# Altium PCB Raspberry_EXT_v1.PcbDoc
Units mm, origin at the board's own origin, x right, y up, seen from the top; angles counter-clockwise.
Board outline 121.65 x 56 mm, 2 copper layers (Top Layer, Bottom Layer); 6 components, 2 nets, 71 pads, 4 vias.
Unrouted connection lines stored in the file: 2.
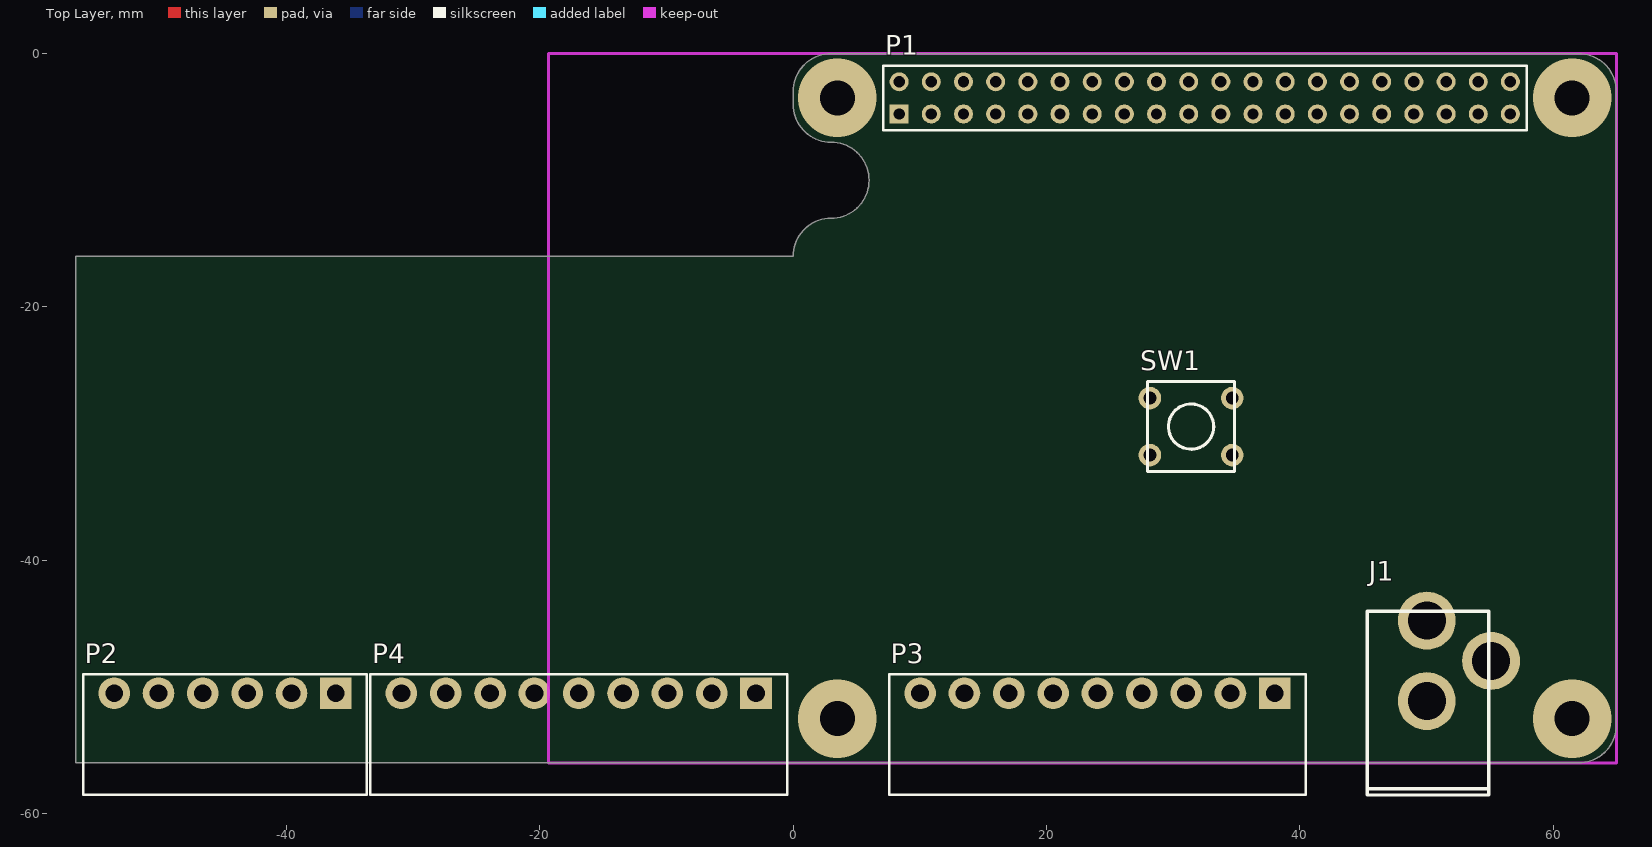
[diagram p0: Top Layer view]
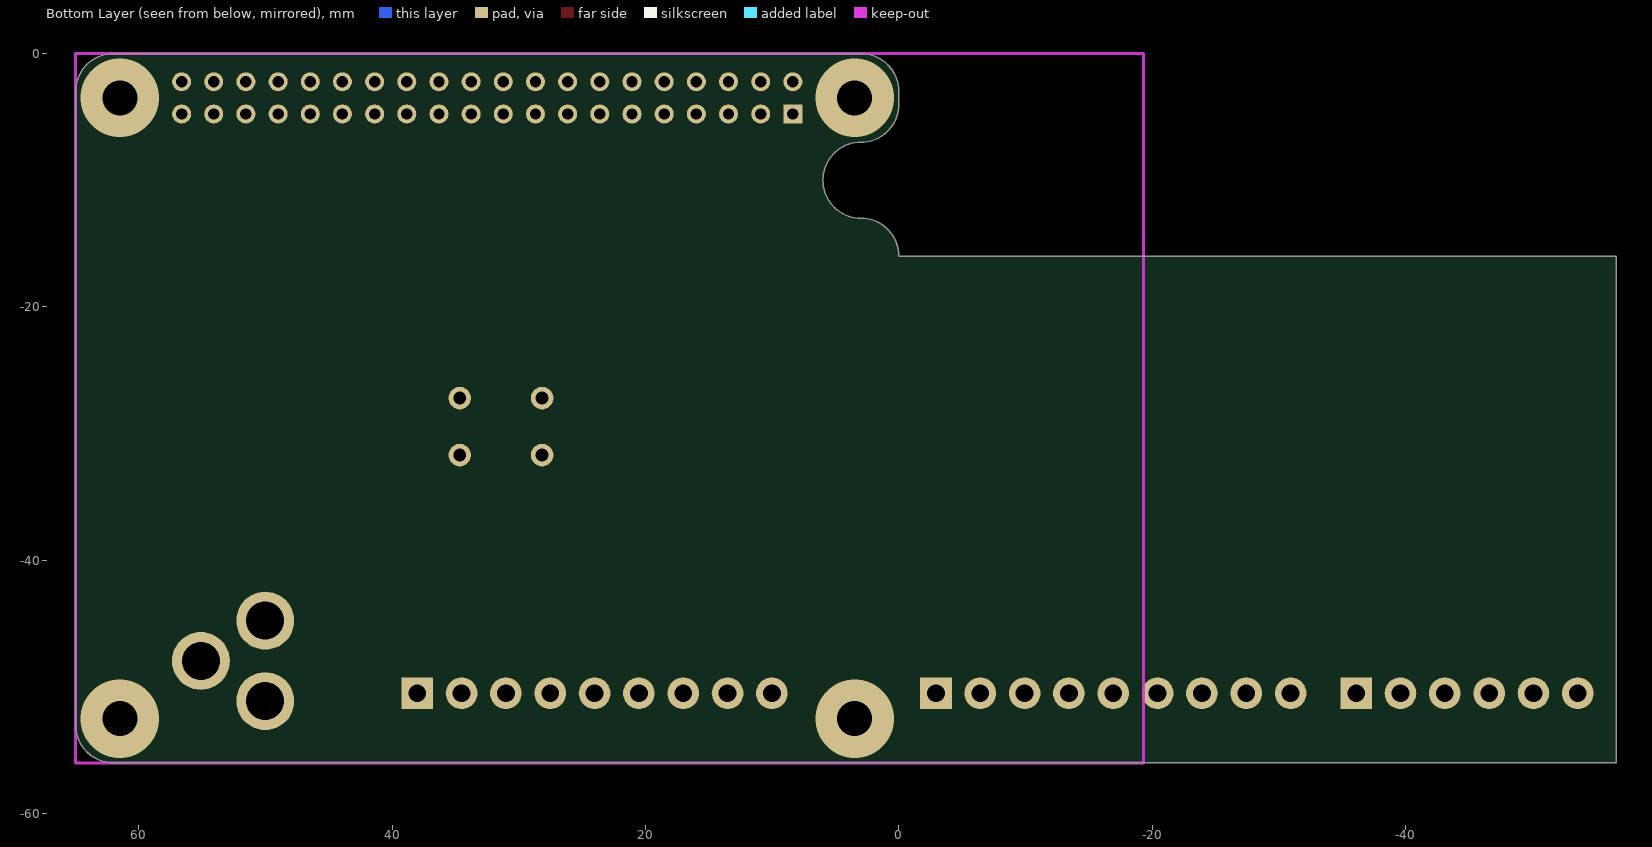
[diagram p1: Bottom Layer view, seen from below]

## Layer stack, top to bottom
Top Layer: signal copper 0.0356
Dielectric: dielectric 0.32, FR-4, Dk 4.8
Bottom Layer: signal copper 0.0356

## Board outline
-56.65,-56 -56.65,-16 0,-16 cw(c3,-16) 3,-13 ccw(c3,-10) 6,-10 ccw(c3,-10) 3,-7 cw(c3,-4) 0,-4 0,-3 cw(c3,-3) 3,0 62,0 cw(c62,-3) 65,-3 65,-53 cw(c62,-53) 62,-56

## Design rules (kind name [scope] priority, off if disabled: settings)
Clearance [All] p1: gap=0.254
PolygonConnect [All] p1: connectstyle=Relief reliefconductorwidth=0.254 reliefentries=4 polygonreliefangle="90 Angle"
RoutingVias [All] p1: holewidth=0.711 width=1.27 viastyle="Through Hole" minholewidth=0.711 minwidth=1.27 maxholewidth=0.711 maxwidth=1.27
SilkscreenOverComponentPads [All] p1: minsilkscreentomaskgap=0.254
SolderMaskExpansion [All] p1: expansion=0.102
Width [All] p1: maxlimit=0.254 minlimit=0.254 preferedwidth=0.254
27 further rules are at their usual default settings.

## Components (designator, comment, footprint, x,y, rotation, side; value= is the part's Value field where it differs from the comment)
J1 "2.xmm" FP_DC_TAP_ANYA 50.025,-44.775 r180 top
P1 "Header 20X2" Header_2X20_pin_2.54 32.5,-3.5 r0 top locked
P2 "RELAY" "Euroblock 3.5pitch 6P" -44.85,-50.5 r180 top
P3 "BUTTONS" "Euroblock 3.5pitch 9P" 24.025,-50.5 r180 top
P4 "LEDS" "Euroblock 3.5pitch 9P" -16.925,-50.5 r180 top
SW1 "SW_ tactile" BUTTON_6X6 31.425,-29.425 r0 top

## Footprints (in the part's own frame and the unit in brackets; to place one, negate y for a bottom-side part, rotate by r counter-clockwise, add the part's x,y. Pads: shape width x height; smd on the part's side, far side on the other; paste and mask are expansions set on the pad)
BUTTON_6X6 [mil]
  round 70 hole 40: 1(-128.25,87.57) 1(127.65,87.57) 2(-128.25,-89.59) 2(127.65,-89.59)
  silkscreen extent -135,-141 135,139, body extent -135,-118 135,118, height 197
"Euroblock 3.5pitch 6P" [mm] "3.5 mm pitch 6P connector"
  rect 2.5x2.5 hole 1.4: 1(-8.75,0)
  round 2.5 hole 1.4 mask+0.102: 2(-5.25,0) 3(-1.75,0) 4(1.75,0) 5(5.25,0) 6(8.75,0)
  silkscreen extent -11.2,-1.5 11.2,8, body extent -11.2,-1.5 11.2,8, height 7.2
"Euroblock 3.5pitch 9P" [mm] "3.5 mm pitch 9P connector"
  rect 2.5x2.5 hole 1.4: 1(-14,0)
  round 2.5 hole 1.4 mask+0.102: 2(-10.5,0) 3(-7,0) 4(-3.5,0) 5(0,0) 6(3.5,0) 7(7,0) 8(10.5,0) 9(14,0)
  silkscreen extent -16.45,-1.5 16.45,8, body extent -16.45,-1.5 16.45,8, height 7.2
FP_DC_TAP_ANYA [mil] "DC HEBA25 TÁPFESZÜLTSÉG ALJZAT ZÁRT, NYÁKBA 90°"
  round 180 hole 118: 1(0,0) 2(0,250) 3(-200,125)
  silkscreen extent -193,-30 185,541, body extent -190,-31 183,539, height 440
Header_2X20_pin_2.54 [mm]
  rect 1.5x1.5 hole 0.9: 1(-24.13,-1.27)
  round 1.5 hole 0.9: 2(-24.13,1.27) 3(-21.59,-1.27) 4(-21.59,1.27) 5(-19.05,-1.27) 6(-19.05,1.27) 7(-16.51,-1.27) 8(-16.51,1.27) 9(-13.97,-1.27) 10(-13.97,1.27) 11(-11.43,-1.27) 12(-11.43,1.27) 13(-8.89,-1.27) 14(-8.89,1.27) 15(-6.35,-1.27) 16(-6.35,1.27) 17(-3.81,-1.27) 18(-3.81,1.27) 19(-1.27,-1.27) 20(-1.27,1.27) 21(1.27,-1.27) 22(1.27,1.27) 23(3.81,-1.27) 24(3.81,1.27) 25(6.35,-1.27) 26(6.35,1.27) 27(8.89,-1.27) 28(8.89,1.27) 29(11.43,-1.27) 30(11.43,1.27) 31(13.97,-1.27) 32(13.97,1.27) 33(16.51,-1.27) 34(16.51,1.27) 35(19.05,-1.27) 36(19.05,1.27) 37(21.59,-1.27) 38(21.59,1.27) 39(24.13,-1.27) 40(24.13,1.27)
  silkscreen extent -25.4,-2.54 25.4,2.54

## Part data
J1: library part DC_TAP_ANYA, "2.xmm DC HEBA25 TÁPFESZÜLTSÉG ALJZAT ZÁRT, NYÁKBA 90°"
P1: "Header, 20-Pin, Dual row"
P2: library part "Header 6", "Header, 6-Pin"
P3 P4: library part "Header 9", "Header, 9-Pin"

## Via types
v1: diameter 6.2, hole 2.75, Top Layer to Bottom Layer, 4 vias

## Nets (pads, with @x,y where several pads share a name; then routed paths per layer and width w, separated by ;. In a path a pad name is that pad's centre, name@x,y a point inside that pad or via, vN(x,y) a via of type N, cw(c..) or ccw(c..) an arc to the next point about the centre after c; other vN are vias at no path point)
GND: J1.2 J1.3 P1.1
VCC: J1.1
pads on no net: P1.2 P1.3 P1.4 P1.5 P1.6 P1.7 P1.8 P1.9 P1.10 P1.11 P1.12 P1.13 P1.14 P1.15 P1.16 P1.17 P1.18 P1.19 P1.20 P1.21 P1.22 P1.23 P1.24 P1.25 P1.26 P1.27 P1.28 P1.29 P1.30 P1.31 P1.32 P1.33 P1.34 P1.35 P1.36 P1.37 P1.38 P1.39 P1.40 P2.1 P2.2 P2.3 P2.4 P2.5 P2.6 P3.1 P3.2 P3.3 P3.4 P3.5 P3.6 P3.7 P3.8 P3.9 P4.1 P4.2 P4.3 P4.4 P4.5 P4.6 P4.7 P4.8 P4.9 SW1.1 SW1.2
copper on no net:
  other v1: 3.5,-52.5 61.5,-52.5 3.5,-3.5 61.5,-3.5

## Keep-outs
Keep-Out Layer:
  lines w0.254: -19.304,-56 -19.304,0 65,0 65,-56 -19.304,-56

## Silkscreen, mask and mechanical layers (free items; w line width, h text height)
Mechanical 15:
  lines w0.254: 15.2,19.7 cw(c15.2,16.7) 18.2,16.7 ; -56.65,-56 -56.65,-16 0,-16 cw(c3,-16) 3,-13 ccw(c3,-10) 6,-10 ccw(c3,-10) 3,-7 cw(c3,-4) 0,-4 0,-3 cw(c3,-3) 3,0 62,0 cw(c62,-3) 65,-3 65,-53 cw(c62,-53) 62,-56 -56.65,-56